# Altium PCB TCM-01.PcbDoc
Units mm, origin at the board's own origin, x right, y up, seen from the top; angles counter-clockwise.
Board outline 30.02 x 30.02 mm, 4 copper layers (Top Layer, VCC, GND, Bottom Layer), stack 0.532 mm thick; 81 components, 49 nets, 208 pads, 188 vias.
Unrouted connection lines stored in the file: 1.
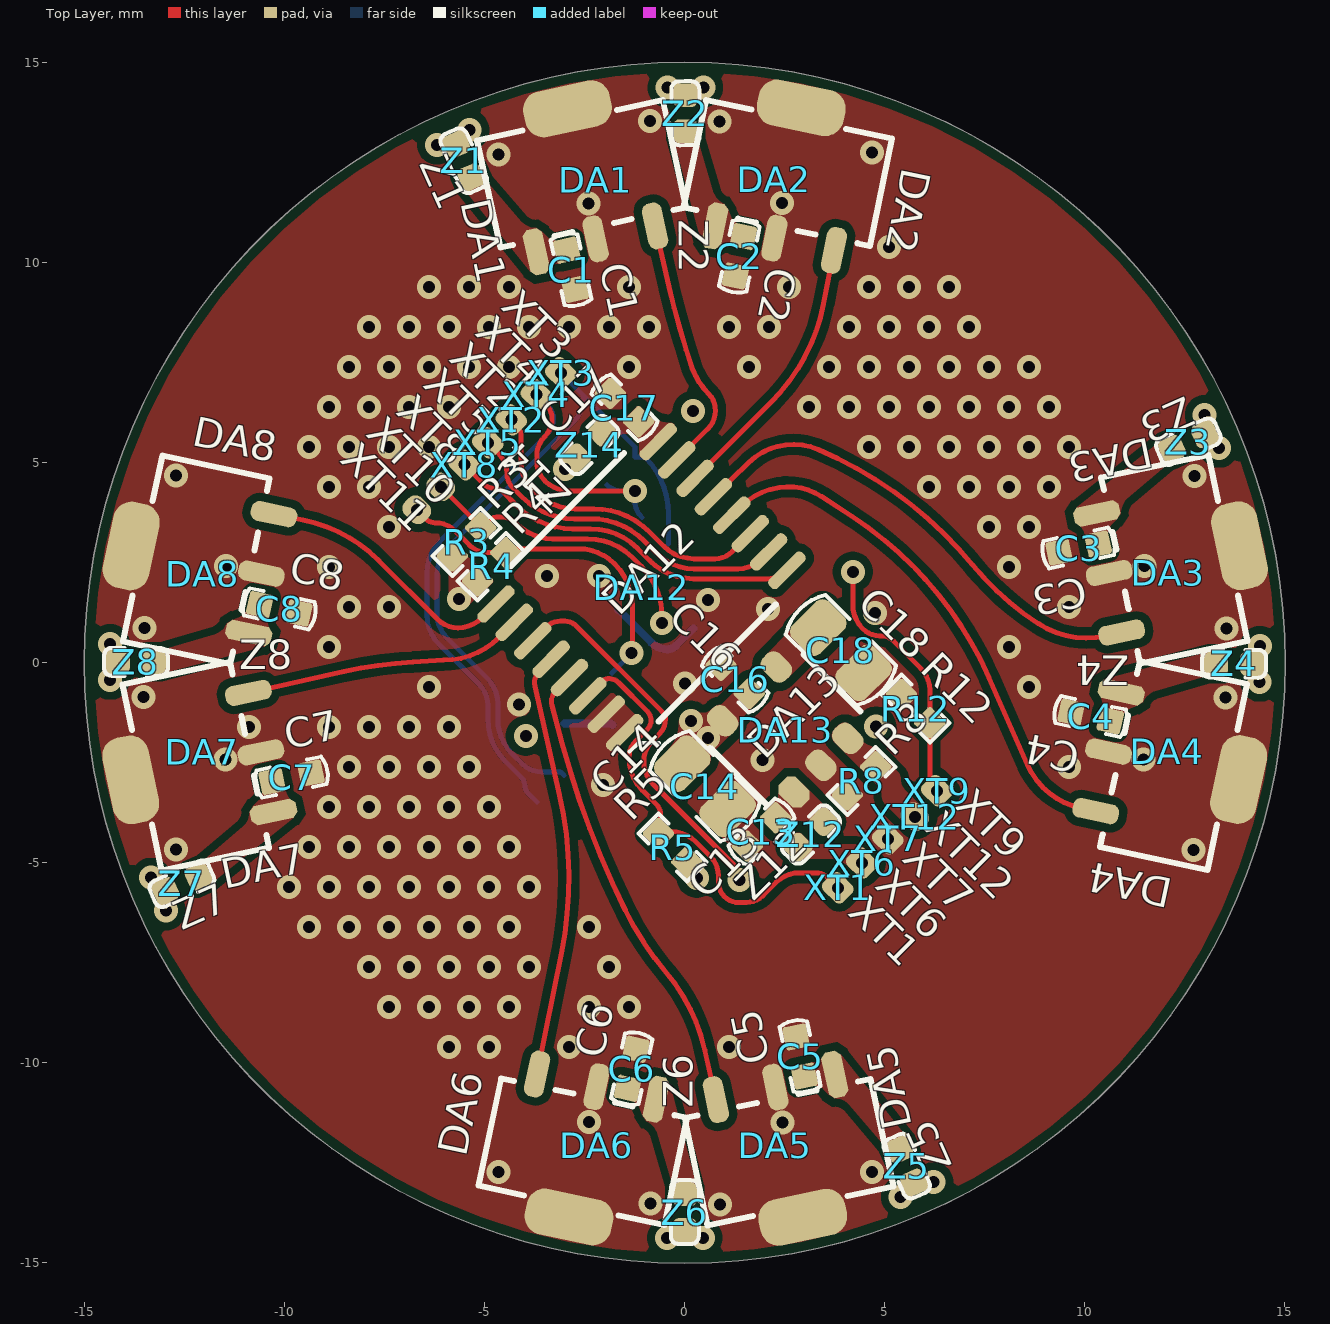
[diagram p0: Top Layer view]
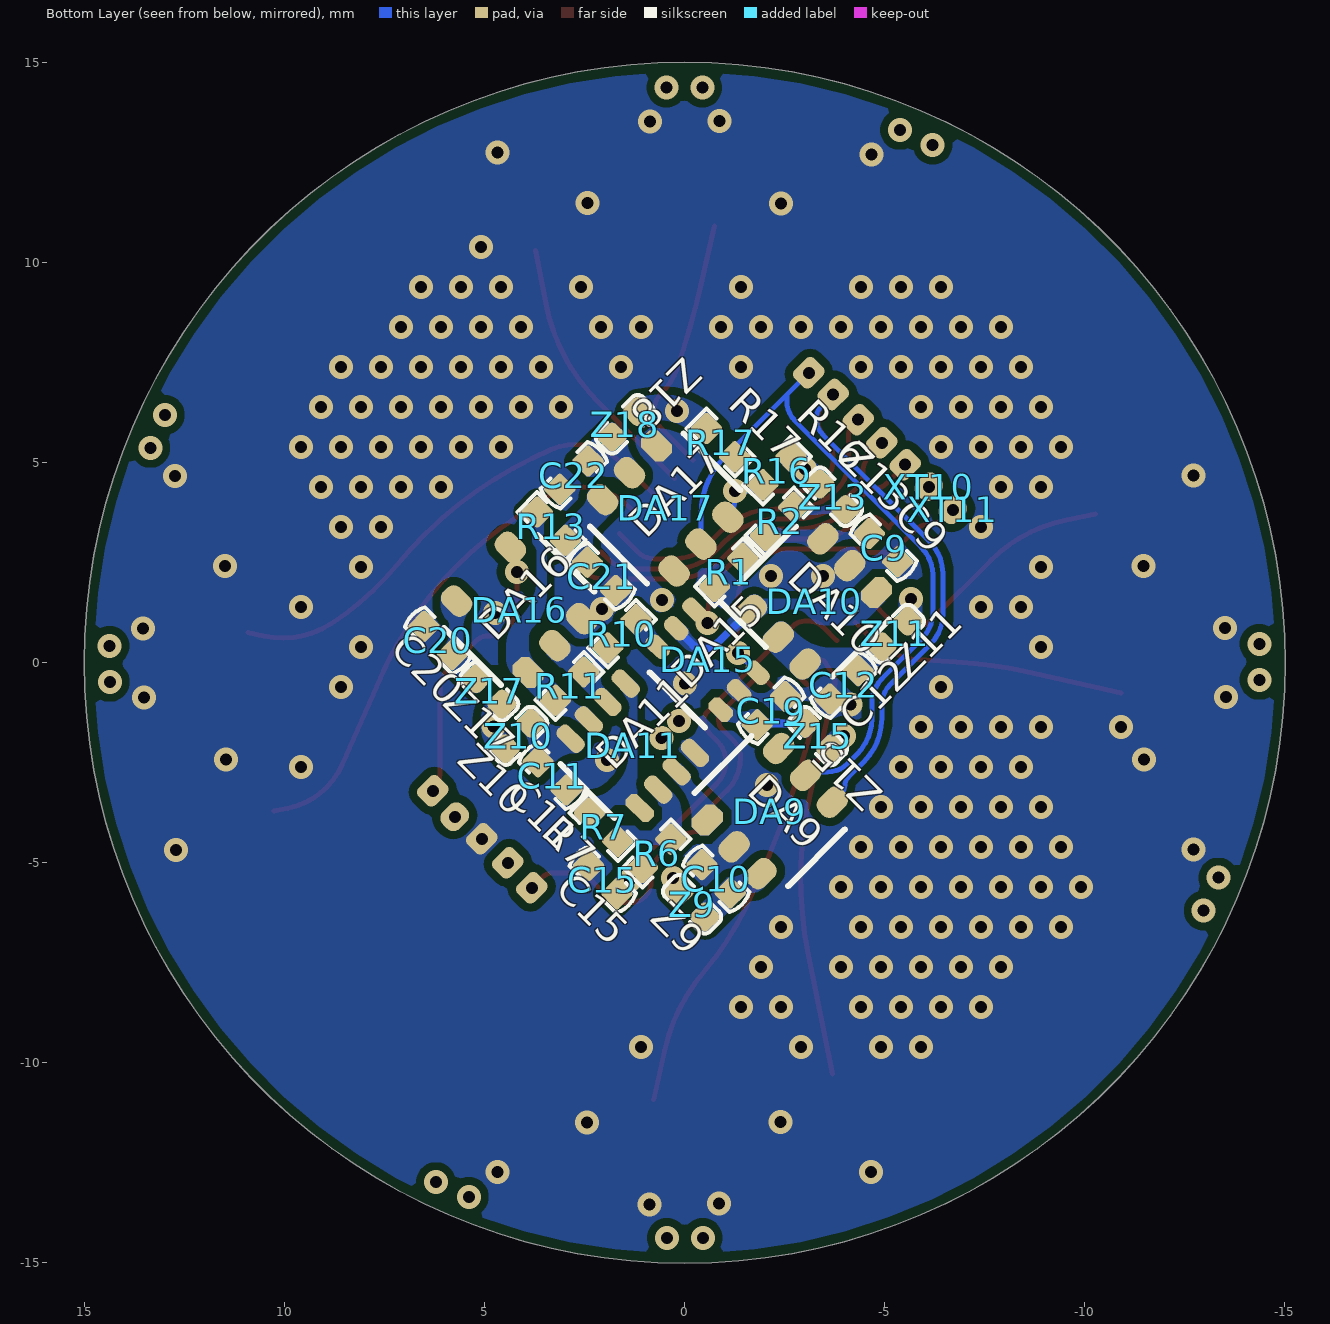
[diagram p1: Bottom Layer view, seen from below]
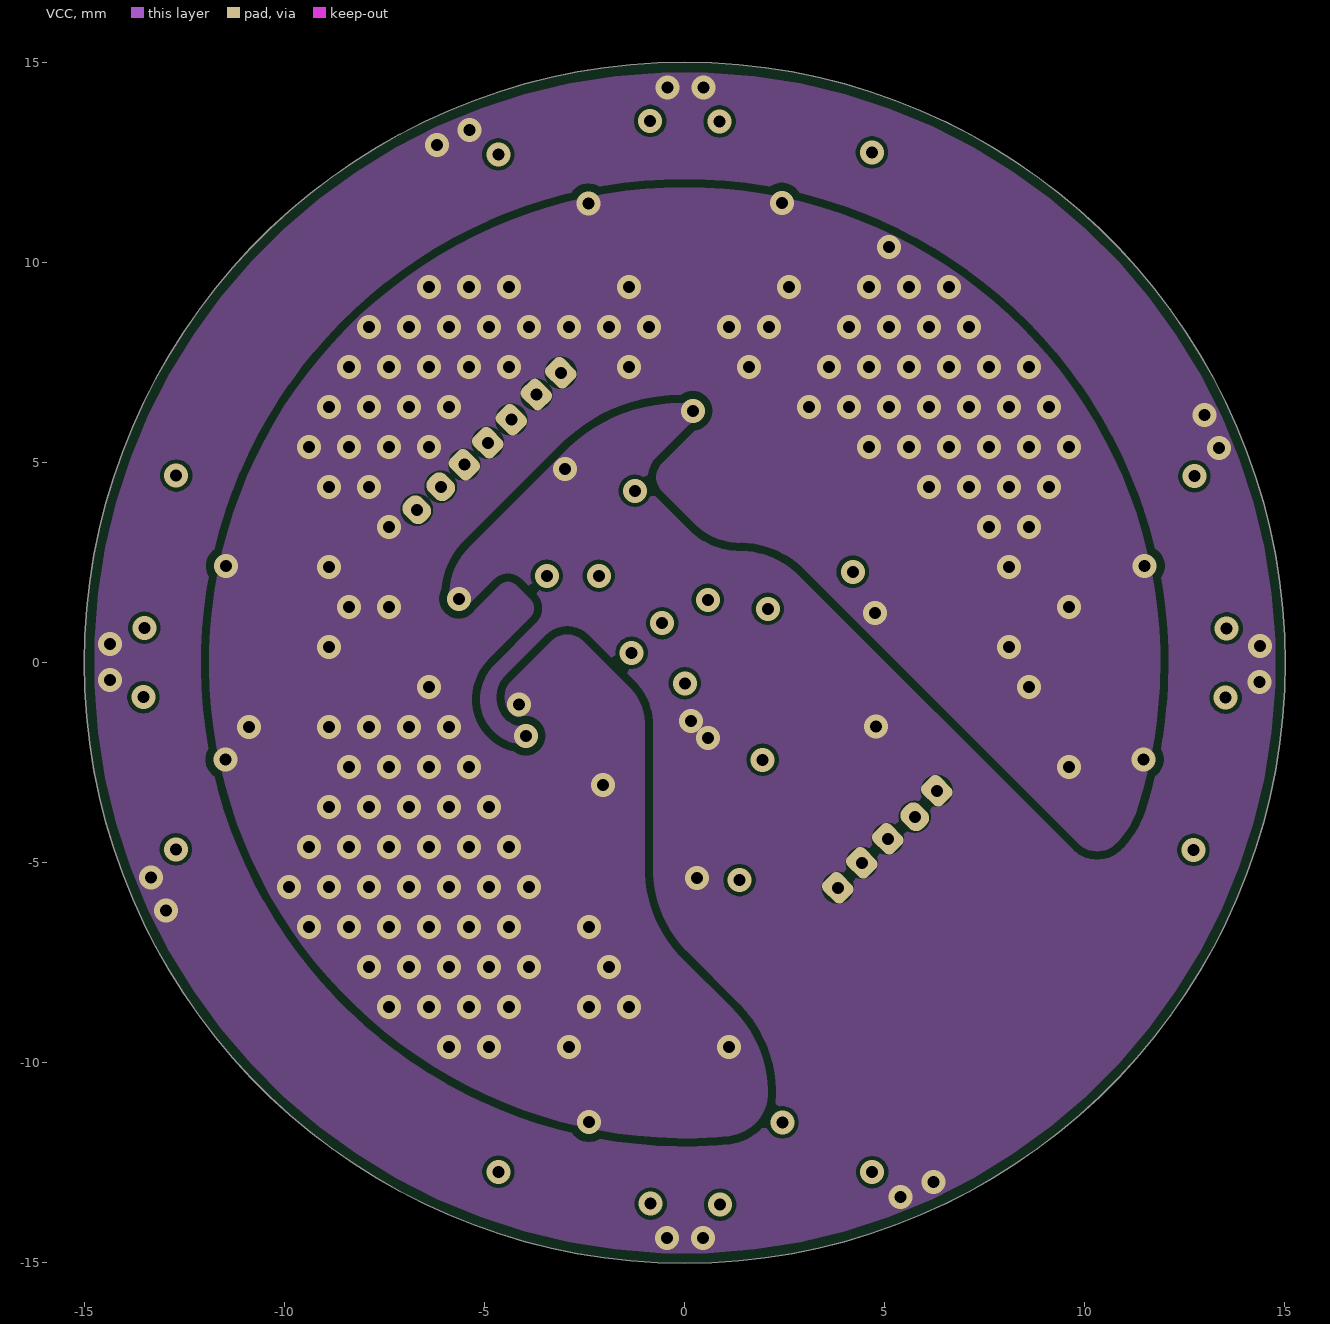
[diagram p2: VCC]
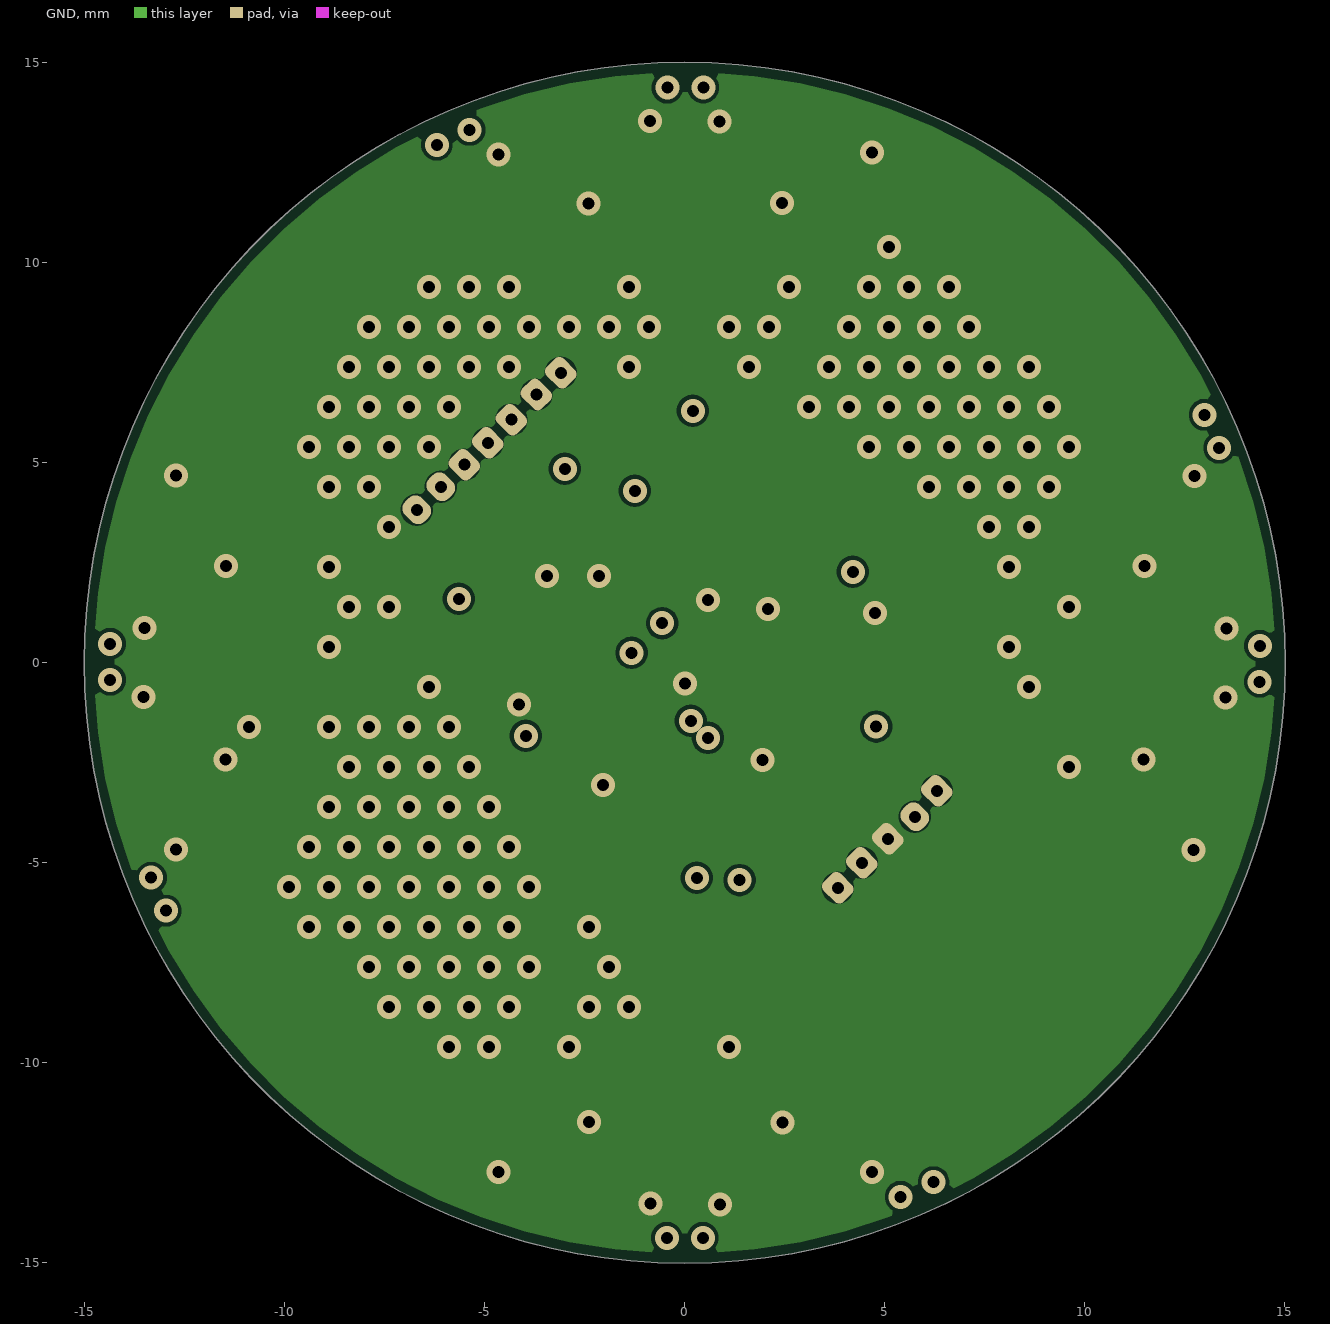
[diagram p3: GND]
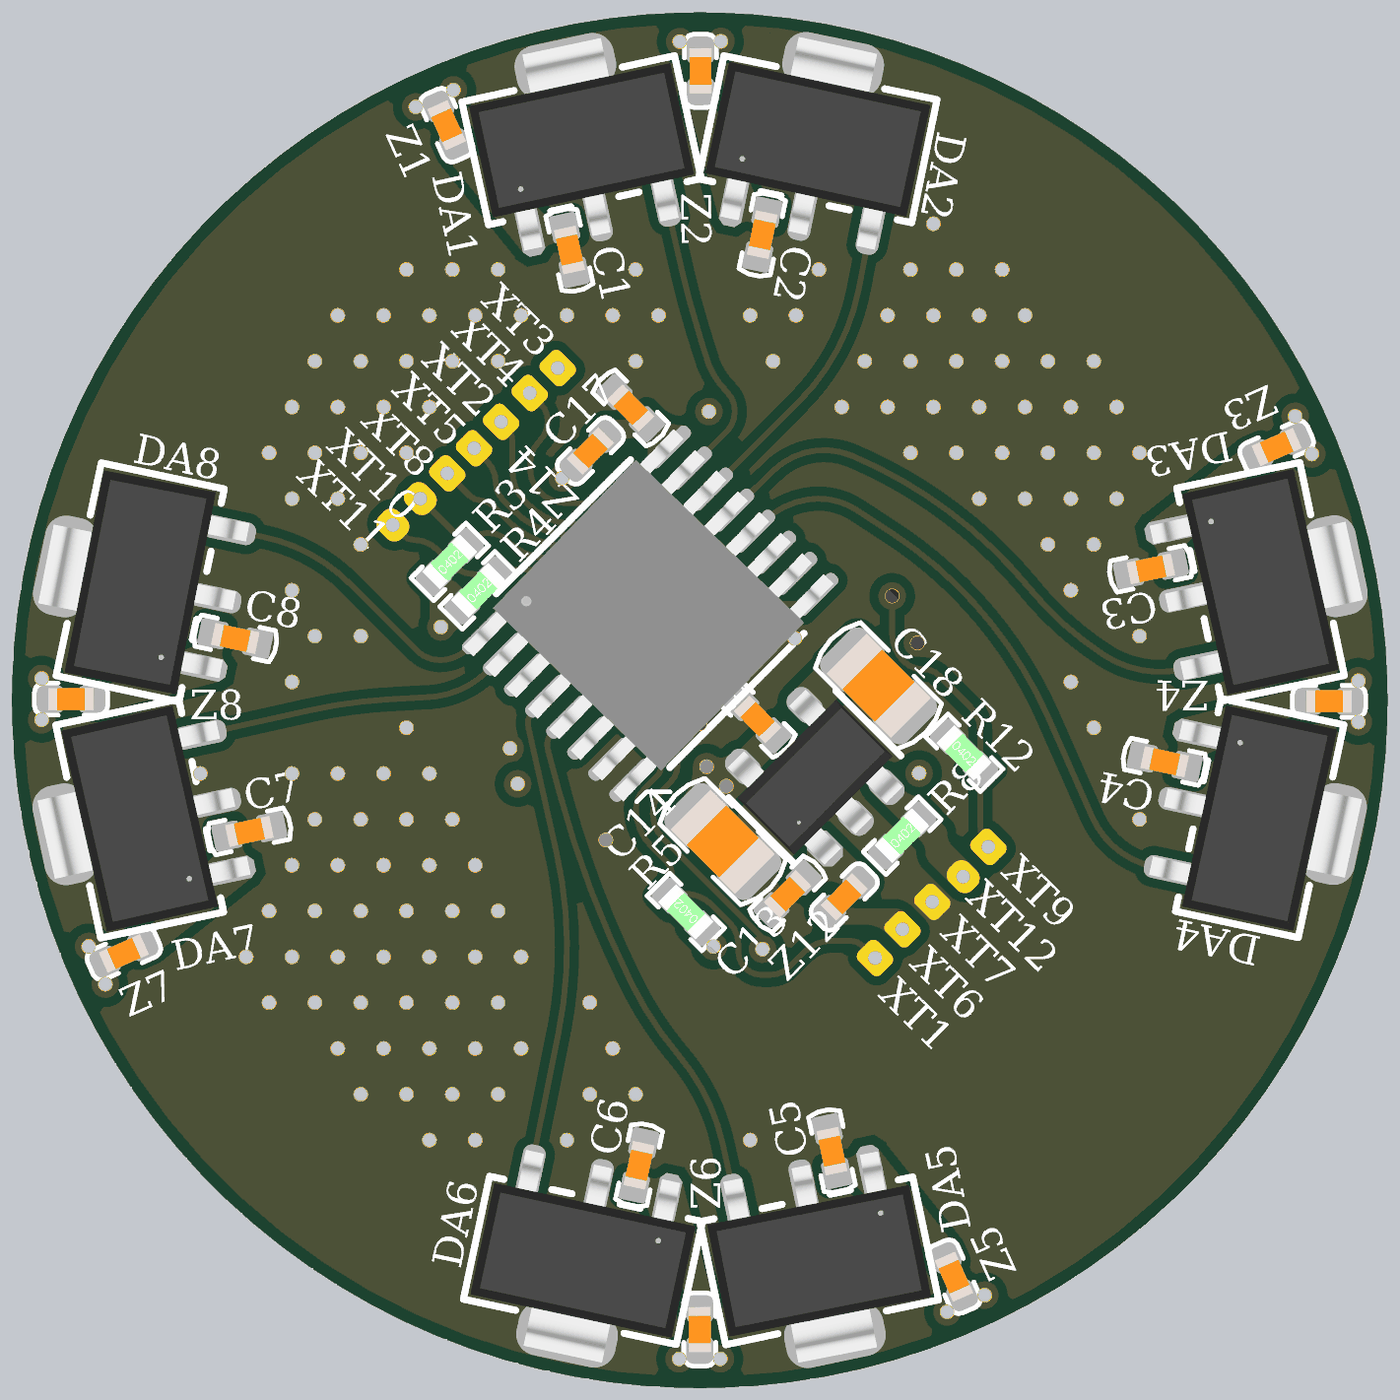
[diagram p4: 3D render of the assembled board from above, using the file's embedded part models]
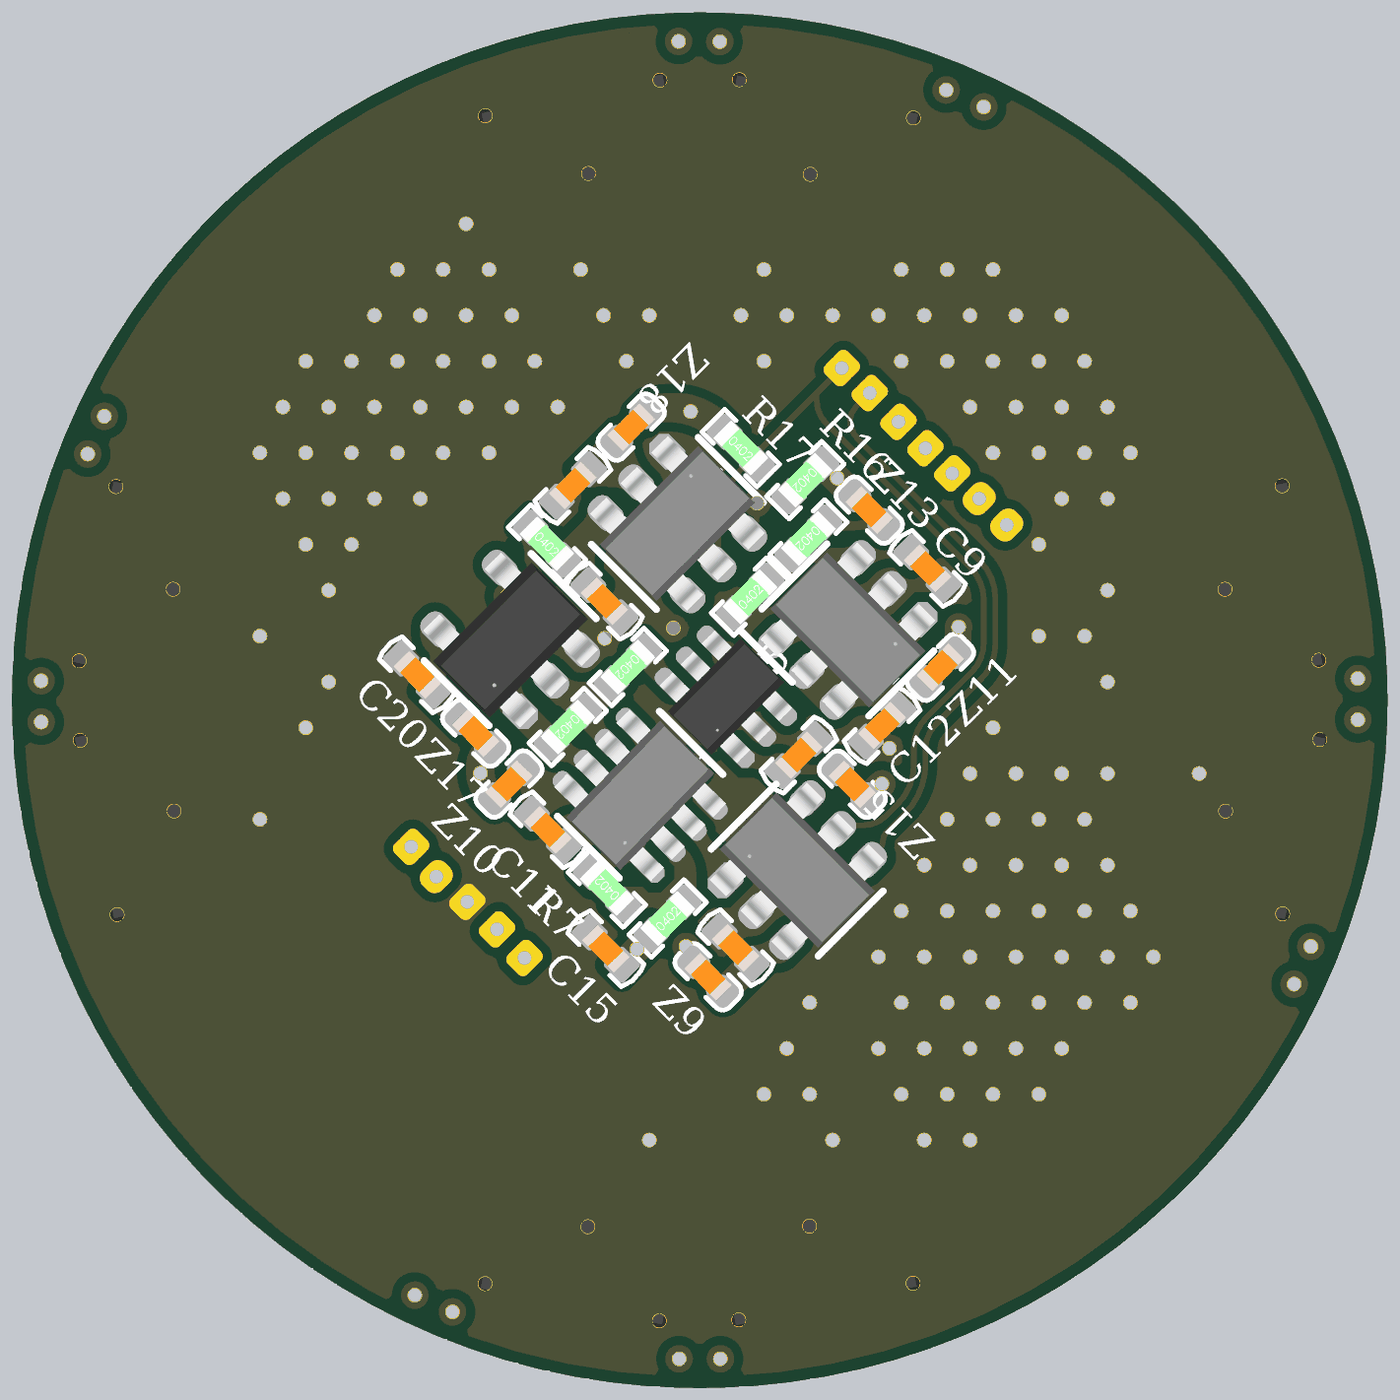
[diagram p5: 3D render of the assembled board from below, using the file's embedded part models]

## Layer stack, top to bottom
Top Solder: solder mask 0.0102, Solder Resist, Dk 3.5
Top Layer: signal copper 0.0175
Dielectric 2: prepreg 0.0711, PP-006, Dk 4.1
VCC: signal copper 0.0175
Dielectric 1: dielectric 0.32, FR-4, Dk 4.8
GND: signal copper 0.0175
Dielectric 3: prepreg 0.0711, PP-006, Dk 4.1
Bottom Layer: signal copper 0.0175
Bottom Solder: solder mask 0.0102, Solder Resist, Dk 3.5

## Board outline
-15.011,0 ccw(c0,0) 0,-15.011 ccw(c0,0) 15.011,0 ccw(c0,0) 0,15.011 ccw(c0,0)

## Design rules (kind name [scope] priority, off if disabled: settings)
AcuteAngle [All] p1: minimum=3.50000000000000E+0001 checktracksonly=FALSE
BoardOutlineClearance "BoardOutlineClearance 1" [All] p1: gap=0.25 ignorepadtopadclearanceinfootprint=FALSE except(0: Arc-SplitContinuation Track-SplitContinuation SMDPad-SplitContinuation THPad-SplitContinuation Via-SplitContinuation Fill-SplitContinuation Poly-SplitContinuation Region-SplitContinuation Text-SplitContinuation) // Milling
Clearance "Clearance-1 1/2 Oz" [All] p1: gap=0.125 ignorepadtopadclearanceinfootprint=FALSE except(0.2: Arc-Fill Arc-Poly Track-Fill Track-Poly SMDPad-SMDPad SMDPad-Fill SMDPad-Poly THPad-Fill THPad-Poly Via-Fill Via-Poly Fill-Fill Fill-Poly Poly-Poly Poly-Region Poly-Text; 0.25: Arc-Hole Track-Hole SMDPad-Hole THPad-Hole Via-Hole Fill-Hole Poly-Hole Region-Hole Text-Hole) // Standart
ComponentClearance [All] p1: gap=0.2 collisioncheckmode=3 verticalgap=0.254 showdistances=FALSE
DiffPairsRouting "DiffPairsRouting 1 Oz" [All] p1: maxlimit=0.254 minlimit=0.2 mostfreqgap=0.254 toplayer_minwidth=0.2 toplayer_maxwidth=0.381 toplayer_prefwidth=0.381 midlayer1_minwidth=0.2 midlayer1_maxwidth=0.381 midlayer1_prefwidth=0.381 midlayer2_minwidth=0.2 midlayer2_maxwidth=0.381 midlayer2_prefwidth=0.381 bottomlayer_minwidth=0.2 bottomlayer_maxwidth=0.381 bottomlayer_prefwidth=0.381 maxuncoupledlength=12.7
DiffPairsRouting "DiffPairsRouting 1/2 Oz" [All] p2: maxlimit=0.254 minlimit=0.1 mostfreqgap=0.254 toplayer_minwidth=0.1 toplayer_maxwidth=0.381 toplayer_prefwidth=0.381 midlayer1_minwidth=0.1 midlayer1_maxwidth=0.381 midlayer1_prefwidth=0.381 midlayer2_minwidth=0.1 midlayer2_maxwidth=0.381 midlayer2_prefwidth=0.381 bottomlayer_minwidth=0.1 bottomlayer_maxwidth=0.381 bottomlayer_prefwidth=0.381 maxuncoupledlength=12.7
HoleSize "Minimum HoleSize" [IsPad] p1: absolutevalues=TRUE maxlimit=5.9 minlimit=0.3 maxpercent=80.000 minpercent=20.000
HoleSize "Minimum HoleSize VIA 1" [IsVia] p2: absolutevalues=TRUE maxlimit=5.9 minlimit=0.3 maxpercent=80.000 minpercent=20.000 // Standart
HoleToHoleClearance Hole2HoleClearance [All] p1: gap=0.25 allowstackedmicrovias=FALSE
MinimumAnnularRing "Minimum AR VIA Standart" [IsVia] p1: minimumring=0.15
MinimumAnnularRing "Minimum AR PAD Standart" [IsPAD] p2: minimumring=0.15
MinimumSolderMaskSliver "SolderMask Bridge Standart" [All] p1: minsoldermaskwidth=0.15 // All Masks
NetAntennae [All] p1 off: netantennaetolerance=0
PlaneClearance "PlaneClearance-1 1/2 Oz" [All] p1: clearance=0.2 // Standart
PlaneConnect "TermalConnect-1 1/2 Oz" [All] p1: planeconnectstyle=Direct reliefexpansion=0.2 reliefentries=4 reliefconductorwidth=0.2 reliefairgap=0.2 // Standart
PolygonConnect "PolygonConnect-1 1/2 Oz" [All] p1: connectstyle=Direct reliefconductorwidth=0.15 reliefentries=4 polygonreliefangle="90 Angle" airgapwidth=0.2 // Standart
RoutingVias [All] p1: holewidth=0.3 width=0.6 viastyle="Through Hole" minholewidth=0.3 minwidth=0.6 maxholewidth=5.9 maxwidth=6.4
SilkToSilkClearance Silk2SilkClearance [All] p1 off: silktosilkclearance=0.15
SilkToSolderMaskClearance Silk2SolderMaskClearance [IsPad] p1 off: minsilkscreentomaskgap=0.15 clearancetoexposedcopper=TRUE
SolderMaskExpansion SolderMaskExpansion-1 [All] p1: expansion=0.05 istentingtop=FALSE // Standart
SupplyNets "Schematic Supply Nets_4" [InNet('DAC_PWR')] p1: voltage=0.000
SupplyNets "Schematic Supply Nets_5" [InNet('GND')] p2: voltage=0.000
SupplyNets "Schematic Supply Nets_3" [InNet('BUF_PWR')] p3: voltage=0.000
SupplyNets "Schematic Supply Nets_2" [InNet('+5v')] p4: voltage=0.000
SupplyNets "Schematic Supply Nets" [InNet('+3v3')] p5: voltage=0.000
UnRoutedNet [All] p1: checkbadconnections=TRUE
Width "Width 1/2 Oz" [All] p1: maxlimit=10 minlimit=0.1 preferedwidth=0.125 toplayer_minwidth=0.125 bottomlayer_minwidth=0.125 minimp=50.000000 maximp=50.000000 favimp=50.000000 checkconnectedcopper=TRUE
19 further rules are at their usual default settings.

## Classes and differential pairs
component class CH4: C7 C8 DA7 DA8 Z7 Z8
component class CH3: C5 C6 DA5 DA6 Z5 Z6
component class CH2: C3 C4 DA3 DA4 Z3 Z4
component class CH1: C1 C2 DA1 DA2 Z1 Z2

## Components (designator, comment, footprint, x,y, rotation, side; value= is the part's Value field where it differs from the comment)
C1 "0.1мк" CC0402 -2.844,9.828 r102.26 top
C2 "0.1мк" CC0402 1.365,10.162 r78.36 top
C3 "0.1мк" CC0402 9.847,2.868 r11.8 top
C4 "0.1мк" CC0402 10.148,-1.343 r347.9 top
C5 "0.1мк" CC0402 2.886,-9.842 r281.9 top
C6 "0.1мк" CC0402 -1.325,-10.15 r258 top
C7 "0.1мк" CC0402 -9.83,-2.862 r191.9 top
C8 "0.1мк" CC0402 -10.138,1.349 r168 top
C9 "0.1мк" CC0402 -4.97,2.878 r45 bottom
C10 "0.1мк" CC0402 -0.784,-5.4 r225 bottom
C11 "0.1мк" CC0402 3.315,-2.829 r45 bottom
C12 "0.1мк" CC0402 -3.98,-0.552 r135 bottom
C13 "0.1мк" CC0402 1.918,-4.228 r45 top
C14 "4.7мк" CC0805 0.503,-3.084 r135 top
C15 "1н" CC0402 2.05,-5.421 r225 bottom
C16 "0.1мк" CC0402 1.259,-0.415 r315 top
C17 "0.1мк" CC0402 -1.507,6.379 r315 top
C18 "4.7мк" CC0805 3.903,0.316 r135 top
C19 "0.1мк" CC0402 -2.162,-1.197 r315 bottom
C20 "0.1мк" CC0402 6.164,0.557 r225 bottom
C21 "10н" CC0402 2.08,2.161 r225 bottom
C22 "0.1мк" CC0402 2.77,4.689 r135 bottom
DA1 "SS59ET" SOT-89B -2.573,12.211 r12.26 top
DA2 "SS59ET" SOT-89B 2.578,12.232 r348.36 top
DA3 "SS59ET" SOT-89B 12.228,2.579 r281.8 top
DA4 "SS59ET" SOT-89B 12.207,-2.573 r257.9 top
DA5 "SS59ET" SOT-89B 2.6,-12.224 r191.9 top
DA6 "SS59ET" SOT-89B -2.551,-12.212 r168 top
DA7 "SS59ET" SOT-89B -12.212,-2.576 r101.9 top
DA8 "SS59ET" SOT-89B -12.2,2.575 r78 top
DA9 "MCP4726A0T-E/CH" SOT-23-6 -2.127,-3.708 r135 bottom
DA10 "TLV9061SQDBVRQ1" SOT-23-6 -3.232,1.534 r315 bottom
DA11 "TLV9062IDDFR" SOT-23-8 1.302,-2.077 r45 bottom
DA12 "CD74HC4051PWR" TSSOP-16 -1.119,1.855 r44.99 top
DA13 "LM8805SF5-3.3" SOT-23-5 2.52,-1.68 r135 top
DA15 "MCP4017T-103ELT" SC-70-6 -0.572,0.075 r45 bottom
DA16 "TS5A3166DBVR" SOT-23-5 4.131,1.313 r45 bottom
DA17 "ADC121C021CIMK" SOT-23-6 0.489,3.858 r225 bottom
R1 "10к" RC0402 -1.099,2.259 r135 bottom
R2 "10к" RC0402 -2.371,3.532 r315 bottom
R3 "2.2к" RC0402 -5.456,3.022 r45 top
R4 "2.2к" RC0402 -4.828,2.4 r45 top
R5 "10к" RC0402 -0.304,-4.621 r135 top
R6 "10к" RC0402 0.701,-4.764 r135 bottom
R7 "10к" RC0402 2.027,-4.11 r45 bottom
R8 "10к" RC0402 4.418,-2.953 r45 top
R10 "1к" RC0402 1.57,0.726 r315 bottom
R11 "10к" RC0402 2.878,-0.582 r315 bottom
R12 "10к" RC0402 5.771,-1.146 r315 top
R13 "100" RC0402 3.335,3.417 r225 bottom
R16 "2.2к" RC0402 -2.304,4.804 r315 bottom
R17 "2.2к" RC0402 -0.896,5.504 r225 bottom
XT1 "Pad" PAD#1 3.825,-5.625 r315 top
XT2 "Pad" PAD#1 -4.336,6.077 r315 top
XT3 "Pad" PAD#1 -3.1,7.25 r315 top
XT4 "Pad" PAD#1 -3.711,6.706 r315 top
XT5 "Pad" PAD#1 -4.925,5.5 r315 top
XT6 "Pad" PAD#1 4.425,-5 r315 top
XT7 "Pad" PAD#1 5.075,-4.4 r315 top
XT8 "Pad" PAD#1 -5.511,4.952 r315 top
XT9 "Pad" PAD#1 6.3,-3.2 r315 top
XT10 "Pad" PAD#2 -6.1,4.4 r315 bottom
XT11 "Pad" PAD#2 -6.7,3.825 r315 bottom
XT12 "Pad" PAD#2 5.75,-3.85 r315 top
Z1 "FB" IND0402 -5.525,12.551 r294.26 top
Z2 "FB" IND0402 0.017,13.738 r270.36 top
Z3 "FB" IND0402 12.592,5.527 r203.8 top
Z4 "FB" IND0402 13.734,-0.024 r179.9 top
Z5 "FB" IND0402 5.549,-12.582 r113.9 top
Z6 "FB" IND0402 0,-13.734 r90 top
Z7 "FB" IND0402 -12.57,-5.525 r23.9 top
Z8 "FB" IND0402 -13.722,0.024 r0 top
Z9 "FB" IND0402 -0.182,-6.037 r225 bottom
Z10 "FB" IND0402 4.165,-1.829 r315 bottom
Z11 "FB" IND0402 -5.253,0.721 r315 bottom
Z12 "FB" IND0402 3.153,-4.293 r225 top
Z13 "FB" IND0402 -3.7,4.15 r225 bottom
Z14 "FB" IND0402 -2.385,5.443 r45 top
Z15 "FB" IND0402 -3.329,-1.834 r45 bottom
Z17 "FB" IND0402 4.891,-0.716 r45 bottom
Z18 "FB" IND0402 1.497,5.962 r315 bottom

## Footprints (in the part's own frame and the unit in brackets; to place one, negate y for a bottom-side part, rotate by r counter-clockwise, add the part's x,y. Pads: shape width x height; smd on the part's side, far side on the other; paste and mask are expansions set on the pad)
CC0402 [mm] "Chip Capacitor, Body 1.0x0.5mm, IPC High Density"
  rrect25% 0.6x0.6 smd mask+0: 1(-0.5,0) 2(0.5,0)
  silkscreen extent -0.91,-0.35 0.91,0.35, body extent -0.5,-0.25 0.5,0.25, height 0.5
CC0805 [mm] "Chip Capacitor, Body 2.0x1.3mm, IPC High Density"
  rrect50% 1x1.3 smd mask+0: 1(-0.8,0) 2(0.8,0)
  silkscreen extent -1.45,-0.7 1.45,0.7, body extent -1,-0.62 1,0.63, height 0.6
IND0402 [mm] "1.6x0.8mm, IPC Medium Density"
  rrect50% 0.6x0.6 smd mask+0: 1(-0.45,0) 2(0.45,0)
  silkscreen extent -0.8,-0.35 0.8,0.35, body extent -0.5,-0.25 0.5,0.25, height 0.5
PAD#1 [mm]
  rrect50% 0.7x0.6 hole 0.3 mask+0: 1(0,0)
PAD#2 [mm]
  rrect80% 0.7x0.6 hole 0.3 mask+0: 1(0,0)
RC0402 [mm] "Chip Resistor, Body 1.1x0.5mm, IPC Medium Density"
  rrect25% 0.6x0.6 smd mask+0: 1(-0.5,0) 2(0.5,0)
  silkscreen extent -0.85,-0.35 0.85,0.35, body extent -0.57,-0.28 0.57,0.28, height 0.41
SC-70-6 [mil]
  oct 26x16 smd paste+0 mask+0: 1(-43.8,25.59)
  rrect80% 26x16 smd paste+0 mask+0: 2(-43.8,0) 3(-43.8,-25.59) 4(43.8,-25.59) 5(43.8,0) 6(43.8,25.59)
  silkscreen extent -32,-49 32,49, body extent -47,-44 47,44, height 43
SOT-23-5 [mm]
  oct 0.8x0.6 smd paste+0 mask+0: 1(-1.25,0.95)
  rrect80% 0.8x0.6 smd paste+0 mask+0: 2(-1.25,0) 3(-1.25,-0.95) 4(1.275,-0.95) 5(1.275,0.95)
  silkscreen extent -0.99,-1.65 1.02,1.65, body extent -1.5,-1.52 1.5,1.52, height 1.45
SOT-23-6 [mm]
  oct 0.8x0.6 smd paste+0 mask+0: 1(-1.262,0.95)
  rrect80% 0.8x0.6 smd paste+0 mask+0: 2(-1.262,0) 3(-1.262,-0.95) 4(1.262,-0.95) 5(1.262,0) 6(1.262,0.95)
  silkscreen extent -1,-1.65 1,1.65, body extent -1.5,-1.52 1.5,1.52, height 1.09
SOT-23-8 [mm]
  oct 0.798x0.4 smd paste+0 mask+0: 1(-1.225,0.972)
  rrect80% 0.798x0.4 smd paste+0 mask+0: 2(-1.225,0.322) 3(-1.225,-0.328) 4(-1.225,-0.978) 5(1.224,-0.978) 6(1.224,-0.328) 7(1.224,0.322) 8(1.224,0.972)
  silkscreen extent -0.95,-1.6 0.95,1.6, body extent -1.49,-1.5 1.49,1.49, height 1.09
SOT-89B [mil]
  oct 19.68x46 smd paste+0 mask+0: 1(-60,-65)
  rrect80% 19.68x46 smd paste+0 mask+0: 2(-0.16,-65) 3(59.69,-65)
  rrect80% 86.61x46 smd paste+0 mask+0: 4(-0.16,66)
  silkscreen extent -94,-54 93,55, body extent -89,-82 88,83, height 51
TSSOP-16 [mil]
  oct 46x12 smd paste+0 mask+0: 1(-111,89.57)
  rrect80% 46x12 smd paste+0 mask+0: 2(-111,63.98) 3(-111,38.39) 4(-111,12.8) 5(-111,-12.8) 6(-111,-38.39) 7(-111,-63.98) 8(-111,-89.57) 9(115,-89.57) 10(115,-63.98) 11(115,-38.39) 12(115,-12.79) 13(115,12.8) 14(115,38.39) 15(115,63.98) 16(115,89.57)
  silkscreen extent -79,-105 83,106, body extent -132,-103 132,103, height 47

## Part data
C1 C2 C3 C4 C5 C6 C7 C8 C9 C10 C11 C12 C13 C14 C15 C16 C17 C18 C19 C20 C21 C22: library part Capacitor
  C1 C2 C3 C4 C5 C6 C7 C8 C9 C10 C11 C12 C13 C16 C17 C19 C20 C22: Volume=0.1мк
  C14 C18: Volume=4.7мк
  C15: Volume=1н
  C21: Volume=10н
DA1 DA2 DA3 DA4 DA5 DA6 DA7 DA8: "SS59ET Honeywell Linear Hall-effect sensor"
DA9: "MCP4726A0T-E/CH DAC 12-bit"
DA10: "Automotive, single, 5.5-V 10-MHz rail-to-rail input and output operational amplifier 6-SOT-23 -40 to 125"
DA11: "TLV9062IDDFR 2-gate OPAMP"
DA12: "5-V, 8:1, 1-channel analog multiplexer 16-TSSOP -55 to 125"
DA13: "The LM8805 series is a low-dropout linear regulator. / There are devices designed specifically for batteryoperated systems. Ground current is very small (50uATyp), that significantly extending battery life. Low power / consumption and high accuracy is achieved through / CMOS and programmable fuse technologies. Output / voltage: 1.5V to 6.0V."
DA15: "MCP4018T-103ELT Digital Rheostat 10k"
DA16: "0.9Ohm on-state resistance, 5-V, 1:1 (SPST), 1-channel analog switch (active high) 5-SOT-23 -40 to 85"
DA17: "I2C-Compatible, 12-Bit Analog-to-Digital Converter with Alert Pin 6-SOT-23-THIN -40 to 105"
R1 R2 R3 R4 R5 R6 R7 R8 R10 R11 R12 R13 R16 R17: library part Resistor
  R13: Volume=100

## Via types
v1: diameter 0.6, hole 0.3, Top Layer to Bottom Layer, tented both sides, 188 vias

## Nets (pads, with @x,y where several pads share a name; then routed paths per layer and width w, separated by ;. In a path a pad name is that pad's centre, name@x,y a point inside that pad or via, vN(x,y) a via of type N, cw(c..) or ccw(c..) an arc to the next point about the centre after c; other vN are vias at no path point)
+3v3: C14.2 C16.2 DA13.5 R3.1 R4.1 R5.1 R16.1 R17.1 Z1.1 Z2.1 Z3.1 Z4.1 Z5.1 Z6.1 Z7.1 Z8.1 Z9.1 Z10.2 Z11.1 Z13.1 Z14.1 Z15.1 Z17.1 Z18.1
  other v1: -0.45,-14.375 0.45,-14.375 5.397,-13.35 6.22,-12.986 -12.974,-6.196 -13.338,-5.374 0.3,-5.375 0.579,-1.877 -3.975,-1.825 4.787,-1.594 0.15,-1.45 14.374,-0.475 -14.363,-0.426 14.376,0.425 -14.363,0.474 -5.65,1.6 -3,4.85 13.36,5.374 12.996,6.198 0.2,6.3 -6.198,12.95 -5.378,13.32 -0.437,14.376 0.463,14.382
+5v: XT6.1 Z12.2
BUF_PWR: C12.2 DA10.5 DA10.6 Z11.2
CH: C15.2 DA12.3 R6.1 | length 9.7
  Top Layer w0.125: DA12.3 DA12.3@-3.454,0.898 ; DA12.3@-3.454,0.898 cw(c-3.108,0.552) -3.108,1.042 -2.995,1.042 cw(c-2.995,0.65) -2.718,0.927 -0.563,-1.228 cw(c-0.758,-1.423) -0.483,-1.423 cw(c-0.976,-1.423) -0.627,-1.771 -0.812,-1.955 ccw(c-0.296,-2.471) -1.025,-2.471 ccw(c-0.231,-2.471) -0.793,-3.032 1.37,-5.195 v1(1.37,-5.433)
CH1-1: DA1.3 DA12.15 | length 6.5
  Top Layer w0.125: DA1.3 -0.392,9.395 ccw(c18.906,13.817) 0.036,7.825 0.193,7.333 ccw(c1.909,8.038) 0.597,6.726 cw(c0.19,6.319) 0.765,6.302 cw(c0.125,6.302) 0.578,5.849 DA12.15
CH1-2: DA2.3 DA12.14 | length 6.9
  Top Layer w0.125: DA12.14 2.158,6.51 ccw(c-1.226,9.894) 3.472,8.981 DA2.3
CH2-1: DA3.3 DA12.13 | length 12.3
  Top Layer w0.125: DA12.13 1.604,5.01 cw(c2.712,3.868) 3.336,5.332 cw(c-0.648,-4.021) 7.2,2.441 ccw(c12.784,7.041) 8.828,0.983 ccw(c10.053,2.858) 10.535,0.672 DA3.3
CH2-2: DA4.3 DA12.12 | length 13.3
  Top Layer w0.125: DA12.12 1.376,3.887 cw(c2.633,2.614) 2.363,4.383 cw(c2.593,2.88) 3.425,4.152 4.201,3.644 cw(c-0.874,-4.108) 7.603,-0.366 8.563,-2.542 ccw(c10.303,-1.774) 9.925,-3.638 DA4.3
CH3-1: DA5.3 DA12.5 | length 11.6
  Top Layer w0.125: DA12.5 -3.224,-0.71 ccw(c-2.964,-0.971) -3.319,-1.067 -3.065,-2.01 ccw(c18.923,3.916) -1.482,-6.196 ccw(c5.418,-2.776) -0.457,-7.754 cw(c-3.887,-10.66) 0.501,-9.683 DA5.3
CH3-2: DA6.3 DA12.4 | length 10.7
  Top Layer w0.125: DA6.3 -3.083,-7.257 ccw(c-12.363,-5.393) -3.129,-3.317 -3.743,-0.582 cw(c-3.358,-0.495) -3.692,-0.284 -3.473,0.062 DA12.4
CH4-1: DA7.3 DA12.2 | length 7
  Top Layer w0.125: DA7.3 -8.523,-0.221 cw(c-6.173,-10.784) -6.795,0.019 -6.029,0.063 ccw(c-6.029,2.043) -4.629,0.643 DA12.2
CH4-2: DA8.3 DA12.1 | length 6.7
  Top Layer w0.125: DA8.3 -9.543,3.569 cw(c-10.275,-0.076) -7.647,2.553 -6.177,1.083 ccw(c-5.675,1.585) -5.675,0.875 ccw(c-5.675,1.741) -5.062,1.129 DA12.1
DAC_PWR: C10.2 DA9.3 Z9.2
GND: C1.1 C2.1 C3.1 C4.1 C5.1 C6.1 C7.1 C8.1 C9.1 C10.1 C11.1 C12.1 C13.1 C14.1 C15.1 C16.1 C17.1 C18.1 C19.1 C20.1 C21.2 C22.1 DA1.2 DA1.4 DA2.2 DA2.4 DA3.2 DA3.4 DA4.2 DA4.4 DA5.2 DA5.4 DA6.2 DA6.4 DA7.2 DA7.4 DA8.2 DA8.4 DA9.2 DA10.2 DA11.4 DA12.7 DA12.8 DA13.2 DA15.2 DA16.3 DA17.1 R1.1 R8.1 R12.1 XT7.1
  other v1: 0.883,-13.546 -0.851,-13.524 4.686,-12.735 -4.657,-12.725 2.443,-11.491 -2.398,-11.478 -5.9,-9.6 -4.9,-9.6 -2.9,-9.6 1.1,-9.6 -7.4,-8.6 -6.4,-8.6 -5.4,-8.6 -4.4,-8.6 -2.4,-8.6 -1.4,-8.6 -7.9,-7.6 -6.9,-7.6 -5.9,-7.6 -4.9,-7.6 -3.9,-7.6 -1.9,-7.6 -9.4,-6.6 -8.4,-6.6 -7.4,-6.6 -6.4,-6.6 -5.4,-6.6 -4.4,-6.6 -2.4,-6.6 -9.9,-5.6 -8.9,-5.6 -7.9,-5.6 -6.9,-5.6 -5.9,-5.6 -4.9,-5.6 -3.9,-5.6 12.717,-4.679 -12.723,-4.662 -9.4,-4.6 -8.4,-4.6 -7.4,-4.6 -6.4,-4.6 -5.4,-4.6 -4.4,-4.6 -8.9,-3.6 -7.9,-3.6 -6.9,-3.6 -5.9,-3.6 -4.9,-3.6 -2.05,-3.05 -8.4,-2.6 -7.4,-2.6 -6.4,-2.6 -5.4,-2.6 9.6,-2.6 -11.479,-2.419 1.947,-2.425 11.474,-2.418 -10.9,-1.6 -8.9,-1.6 -7.9,-1.6 -6.9,-1.6 -5.9,-1.6 -4.14,-1.048 13.522,-0.874 -13.534,-0.859 -6.4,-0.6 8.6,-0.6 0,-0.513 -8.9,0.4 8.1,0.4 13.548,0.859 -13.512,0.875 4.75,1.25 2.075,1.35 -8.4,1.4 -7.4,1.4 9.6,1.4 0.575,1.575 -3.45,2.175 -2.15,2.175 -8.9,2.4 8.1,2.4 -11.466,2.422 11.495,2.423 -7.4,3.4 7.6,3.4 8.6,3.4 -8.9,4.4 -7.9,4.4 6.1,4.4 7.1,4.4 8.1,4.4 9.1,4.4 12.743,4.664 -12.713,4.681 -9.4,5.4 -8.4,5.4 -7.4,5.4 -6.4,5.4 4.6,5.4 5.6,5.4 6.6,5.4 7.6,5.4 8.6,5.4 9.6,5.4 -8.9,6.4 -7.9,6.4 -6.9,6.4 -5.9,6.4 3.1,6.4 4.1,6.4 5.1,6.4 6.1,6.4 7.1,6.4 8.1,6.4 9.1,6.4 -8.4,7.4 -7.4,7.4 -6.4,7.4 -5.4,7.4 -4.4,7.4 -1.4,7.4 1.6,7.4 3.6,7.4 4.6,7.4 5.6,7.4 6.6,7.4 7.6,7.4 8.6,7.4 -7.9,8.4 -6.9,8.4 -5.9,8.4 -4.9,8.4 -3.9,8.4 -2.9,8.4 -1.9,8.4 -0.9,8.4 1.1,8.4 2.1,8.4 4.1,8.4 5.1,8.4 6.1,8.4 7.1,8.4 -6.4,9.4 -5.4,9.4 -4.4,9.4 -1.4,9.4 2.6,9.4 4.6,9.4 5.6,9.4 6.6,9.4 5.1,10.4 -2.412,11.479 2.429,11.497 -4.663,12.709 4.68,12.759 0.869,13.533 -0.865,13.545
MUXAddr_0: DA12.11 XT2.1 | length 8.1
  Top Layer w0.125: XT2.1 -4.217,5.958 cw(c-4.528,5.648) -4.088,5.648 -4.088,4.991 ccw(c-3.193,4.991) -3.826,4.358 -3.726,4.257 ccw(c-2.742,5.241) -2.742,3.85 -2.274,3.85 cw(c-2.274,1.892) -0.89,3.276 -0.527,2.914 ccw(c0.231,3.672) 0.231,2.6 0.759,2.6 ccw(c0.759,3.197) 1.181,2.775 DA12.11
MUXAddr_1: DA12.10 XT5.1 | length 8.5
  Top Layer w0.125: XT5.1 -4.649,5.224 cw(c-5.129,4.744) -4.45,4.744 -4.45,4.741 ccw(c-3.938,4.741) -4.3,4.379 -4.059,4.138 ccw(c-2.761,5.436) -2.761,3.6 -2.369,3.6 -2.354,3.6 cw(c-2.354,1.7) -1.01,3.043 -1,3.033 -0.808,2.842 ccw(c0.379,4.029) -0.805,2.838 -0.705,2.739 ; -0.705,2.738 ccw(c0.231,3.672) 0.232,2.35 0.376,2.35 ccw(c0.379,4.029) 0.379,2.35 1.334,2.35 ccw(c1.334,3.173) 1.916,2.591 DA12.10
MUXAddr_2: DA12.9 XT8.1 | length 9.1
  Top Layer w0.125: XT8.1 -5.022,4.464 ccw(c-4.776,4.71) -4.776,4.362 cw(c-4.776,4.025) -4.538,4.263 -4.208,3.933 ccw(c-2.801,5.34) -2.801,3.35 -2.354,3.35 cw(c-2.354,1.7) -1.187,2.867 -0.872,2.551 ccw(c0.218,3.641) 0.218,2.1 2.046,2.1 ccw(c2.046,2.821) DA12.9
MUXEn: DA12.6 R5.2 XT1.1 | length 11.3
  Top Layer w0.125: DA12.6 -2.049,-0.454 cw(c-1.913,-0.589) -1.913,-0.398 -1.887,-0.398 cw(c-1.887,-0.721) -1.658,-0.492 -0.935,-1.216 cw(c-1.158,-1.439) -0.961,-1.685 -0.961,-1.688 -1.221,-1.948 ccw(c-0.801,-2.368) -1.395,-2.368 ccw(c-0.225,-2.368) -1.052,-3.195 -0.714,-3.534 cw(c-0.98,-3.8) -0.604,-3.8 -0.604,-4.221 -0.337,-4.221 cw(c-0.337,-5.087) 0.275,-4.475 0.64,-4.84 cw(c0.15,-5.33) 0.843,-5.33 0.843,-5.49 ccw(c1.347,-5.49) 1.347,-5.994 1.542,-5.994 ccw(c1.542,-5.417) 1.95,-5.825 2.278,-5.497 cw(c2.875,-6.095) 2.875,-5.25 3.288,-5.25 cw(c3.288,-5.628) 3.556,-5.361 3.82,-5.625 XT1.1
NetC1_2: C1.2 DA1.1 Z1.2
NetC2_2: C2.2 DA2.1 Z2.2
NetC3_2: C3.2 DA3.1 Z3.2
NetC4_2: C4.2 DA4.1 Z4.2
NetC5_2: C5.2 DA5.1 Z5.2
NetC6_2: C6.2 DA6.1 Z6.2
NetC7_2: C7.2 DA7.1 Z7.2
NetC8_2: C8.2 DA8.1 Z8.2
NetC9_2: C9.2 DA10.3 R1.2 R2.2
NetC11_2: C11.2 DA11.8 Z10.1
NetC13_2: C13.2 DA13.1 Z12.1
NetC17_2: C17.2 DA12.16 Z14.2
NetC18_2: C18.2 DA13.4
NetC19_2: C19.2 DA15.1 Z15.2 | length 1.2
  Bottom Layer w0.2: Z15.2 -1.894,-1.516 cw(c-1.894,-1.636) C19.2
NetC20_2: C20.2 DA16.5 Z17.2
NetC21_1: C21.1 DA17.3 R13.2
NetC22_2: C22.2 DA17.2 Z18.2
NetDA11_1: DA11.1 DA11.5 R7.2
NetDA11_2: DA11.2 R6.2 R7.1
NetDA11_6: DA11.6 DA16.2 R10.2 R11.1
NetDA11_7: DA11.7 DA16.1 R11.2 R13.1
NetDA15_6: DA15.6 R10.1
NetR2_1: R2.1 Z13.2
PWR_EN: DA13.3 R8.2 XT12.1
SCL: DA9.5 DA17.5 R17.2 XT3.1 | length 18
  Bottom Layer w0.125: XT3.1 -2.55,6.7 ; DA9.5 -3.104,-2.731 -3.571,-2.731 cw(c-3.571,-2.033) -4.064,-2.526 -4.309,-2.282 cw(c-3.424,-1.397) -4.675,-1.397 -4.675,-1.023 ccw(c-5.576,-1.023) -4.939,-0.386 -5.929,0.604 cw(c-5.276,1.258) -6.2,1.258 -6.2,2.189 cw(c-5.207,2.189) -5.909,2.891 -2.764,6.036 ccw(c-3.281,6.553) -2.55,6.553 -2.55,6.7 ; DA17.5 -0.404,3.71 ccw(c-2.44,3.71) -1,5.15 R17.2 -1.25,5.4 -2.55,6.7
SCL_LF: DA15.3 R4.2 XT11.1 | length 8.5
  Top Layer w0.125: XT11.1 -6.47,3.595 ccw(c-6.24,3.825) -6.24,3.5 cw(c-6.24,2.778) -5.73,3.289 -5.376,2.934 ccw(c-4.939,3.371) -4.939,2.754 R4.2 -4.378,2.85 -2.656,2.85 cw(c-2.656,1.581) -1.758,2.478 cw(c-2.844,1.393) -1.309,1.393 -1.309,0.27 v1(-1.328,0.25)
  Bottom Layer w0.125: DA15.3 -1.328,0.238 v1(-1.328,0.25)
SDA: DA9.4 DA17.6 R16.2 XT4.1 | length 18.8
  Top Layer w0.125: XT4.1 -3.47,6.465 cw(c-3.838,6.096) -3.317,6.096 cw(c-3.945,6.096) -3.501,5.653 -3.509,5.644 ccw(c-3.048,5.184) -3.7,5.184 -3.7,5.035 ccw(c-3.013,5.035) -3.499,4.549 ccw(c-2.898,5.149) -2.898,4.3 v1(-1.25,4.3)
  Bottom Layer w0.125: XT4.1 -3.401,6.396 cw(c-3.686,6.11) -3.283,6.11 cw(c-3.862,6.11) -3.452,5.701 -6.123,3.03 ccw(c-5.334,2.241) -6.45,2.241 -6.45,1.2 ccw(c-5.416,1.2) -6.147,0.468 -5.146,-0.533 cw(c-5.679,-1.066) -4.925,-1.066 -4.925,-1.397 ccw(c-3.401,-1.397) -4.479,-2.474 -4.078,-2.875 cw(c-4.266,-3.063) -4,-3.063 ccw(c-3.723,-3.063) -3.919,-3.259 DA9.4 ; R16.2 ccw(c-1.588,4.812) -1.588,4.3 v1(-1.25,4.3) -1.25,4.059 ccw(c-0.653,4.059) DA17.6
SDA_LF: DA15.4 R3.2 XT10.1 | length 7.5
  Top Layer w0.125: XT10.1 -5.103,3.404 R3.2 -4.966,3.511 cw(c-4.632,3.177) -4.632,3.65 -4.601,3.65 cw(c-4.601,3.103) -4.215,3.49 -4.194,3.469 ccw(c-3.303,4.361) -3.303,3.1 -2.429,3.1 cw(c-2.429,1.525) -1.315,2.639 -1.097,2.421 cw(c-2.383,1.135) -0.565,1.135 v1(-0.565,0.989)
SW: DA16.4 R12.2 XT9.1 | length 6.5
  Top Layer w0.125: v1(4.2,2.275) 4.2,1.454 ccw(c5.054,1.454) 4.45,0.85 ccw(c4.872,1.272) 4.872,0.675 4.9,0.675 cw(c4.9,0.217) 5.224,0.541 5.898,-0.133 cw(c5.35,-0.682) 6.125,-0.682 R12.2 6.125,-2.778 ccw(c6.722,-2.778) XT9.1
Voffset: DA9.1 DA11.3
Vref: DA10.1 DA10.4 DA15.5 | length 2.5
  Bottom Layer w0.2: DA10.4 -1.64,1.313 -0.826,0.499 ccw(c-0.434,0.892) -0.434,0.336 ccw(c-0.434,0.634) -0.224,0.423 ; -0.223,0.424 DA15.5
pads on no net: DA9.6 DA17.4

## Polygon pours and split planes (outlines as drawn)
NetC3_2 on Top Layer "NONET_L01_P-001" (solid, remove dead copper, pour order 42): 12.164,5.011 ccw(c12.164,4.926) 12.104,4.986 11.052,4.096 ccw(c11.417,3.728) 10.898,3.73 10.801,3.582 10.665,3.446 ccw(c10.858,3.252) 10.584,3.252 9.997,3.13 9.997,3.165 ccw(c9.673,3.166) 9.902,3.394 9.8,3.884 11.888,5.539
+5v on Top Layer "NONET_L01_P-001" (solid, remove dead copper, pour order 43): 4.213,-5.212 4.096,-5.095 ccw(c3.625,-5.566) 3.625,-4.9 3.013,-4.9 ccw(c3.013,-5.001) 2.941,-4.93 2.517,-4.505 2.729,-4.293 cw(c2.835,-4.399) 2.835,-4.249 cw(c2.835,-4.399) 2.941,-4.293 3.047,-4.399 ccw(c3.384,-4.062) 3.384,-4.539 4.236,-4.539 cw(c4.236,-4.906) 4.496,-4.646 4.637,-4.788
PWR_EN on Top Layer "NONET_L01_P-001" (solid, remove dead copper, pour order 44): 3.759,-2.011 cw(c3.949,-1.821) 3.68,-1.821 cw(c3.92,-1.821) 3.75,-1.651 3.835,-1.567 cw(c4.005,-1.736) 4.005,-1.496 cw(c4.005,-1.708) 4.154,-1.558 5.332,-2.736 cw(c5.168,-2.9) 5.4,-2.9 ccw(c5.824,-2.9) 5.524,-3.2 5.962,-3.638 5.538,-4.062 5.031,-3.555 cw(c5.285,-3.3) 4.925,-3.3 ccw(c4.63,-3.3) 4.838,-3.091
NetC8_2 on Top Layer "NONET_L01_P-001" (solid, remove dead copper, pour order 77): -13.122,0.324 ccw(c-13.088,0.401) -13.058,0.322 -11.736,0.711 ccw(c-11.921,1.196) -11.447,0.985 -11.299,1.081 -11.119,1.151 ccw(c-11.217,1.406) -10.967,1.295 -10.38,1.17 -10.395,1.138 ccw(c-10.099,1.007) -10.401,0.89 -10.505,0.401 -13.084,-0.271
NetC6_2 on Top Layer "NONET_L01_P-001" (solid, remove dead copper, pour order 76): -0.3,-13.134 ccw(c-0.378,-13.1) -0.298,-13.069 -0.688,-11.748 ccw(c-1.172,-11.933) -0.961,-11.459 -1.057,-11.311 -1.127,-11.131 ccw(c-1.382,-11.229) -1.271,-10.979 -1.146,-10.392 -1.114,-10.407 ccw(c-0.983,-10.111) -0.866,-10.413 -0.377,-10.517 0.295,-13.095
NetC5_2 on Top Layer "NONET_L01_P-001" (solid, remove dead copper, pour order 75): 5.032,-12.155 ccw(c4.947,-12.155) 5.007,-12.095 4.116,-11.044 ccw(c3.748,-11.41) 3.749,-10.892 3.601,-10.795 3.464,-10.659 ccw(c3.271,-10.852) 3.271,-10.578 3.147,-9.991 3.182,-9.991 ccw(c3.182,-9.667) 3.411,-9.896 3.901,-9.793 5.56,-11.879
NetC4_2 on Top Layer "NONET_L01_P-001" (solid, remove dead copper, pour order 49): 13.134,-0.323 ccw(c13.099,-0.4) 13.069,-0.321 11.746,-0.708 ccw(c11.931,-1.193) 11.458,-0.981 11.309,-1.077 11.129,-1.146 ccw(c11.227,-1.402) 10.977,-1.29 10.39,-1.165 10.405,-1.132 ccw(c10.109,-1.001) 10.411,-0.884 10.516,-0.396 13.096,0.272
NetC2_2 on Top Layer "NONET_L01_P-001" (solid, remove dead copper, pour order 48): 0.321,13.14 ccw(c0.398,13.106) 0.319,13.075 0.717,11.756 ccw(c1.2,11.944) 0.992,11.469 1.089,11.322 1.16,11.142 ccw(c1.415,11.242) 1.306,10.991 1.185,10.404 1.152,10.418 ccw(c1.023,10.121) 0.904,10.422 0.415,10.523 -0.274,13.097
NetC1_2 on Top Layer "NONET_L01_P-001" (solid, remove dead copper, pour order 46): -5.005,12.127 ccw(c-4.92,12.128) -4.98,12.067 -4.082,11.022 ccw(c-3.716,11.39) -3.714,10.872 -3.565,10.776 -3.428,10.64 ccw(c-3.236,10.835) -3.234,10.561 -3.106,9.975 -3.142,9.975 ccw(c-3.14,9.651) -3.37,9.879 -3.859,9.772 -5.531,11.847
NetC7_2 on Top Layer "NONET_L01_P-001" (solid, remove dead copper, pour order 45): -12.143,-5.008 ccw(c-12.143,-4.923) -12.083,-4.983 -11.032,-4.092 ccw(c-11.398,-3.724) -10.88,-3.725 -10.783,-3.577 -10.647,-3.441 ccw(c-10.84,-3.247) -10.566,-3.247 -9.979,-3.123 -9.979,-3.159 ccw(c-9.655,-3.159) -9.884,-3.388 -9.781,-3.877 -11.867,-5.536
NetC13_2 on Top Layer "NONET_L01_P-001" (solid, remove dead copper, pour order 78): 2.484,-4.087 cw(c2.815,-4.418) 2.815,-3.95 2.825,-3.95 cw(c2.825,-4.427) 3.162,-4.09 3.259,-4.187 3.684,-3.763 2.944,-3.023 2.941,-3.023 ccw(c2.941,-3.868) 2.343,-3.271 2.343,-3.334 cw(c2.23,-3.334) 2.31,-3.415 2.062,-3.663
+3v3 on Top Layer "NONET_L01_P-001" (solid, remove dead copper, pour order 79): -0.416,-2.165 ccw(c-1.051,-1.53) -0.153,-1.53 -0.153,-1.45 0.012,-1.284 cw(c0.275,-1.547) 0.275,-1.175 0.279,-1.179 ccw(c0.45,-1.009) 0.45,-1.25 0.464,-1.25 ccw(c0.464,-0.967) 0.664,-1.167 0.706,-1.125 cw(c0.876,-1.294) 0.876,-1.054 ccw(c0.876,-0.991) 0.921,-1.036 1.4,-0.556 1.824,-0.981 1.383,-1.422 ccw(c1.482,-1.521) 1.342,-1.521 1.342,-1.544 cw(c1.207,-1.544) 1.302,-1.64 0.729,-2.213 ccw(c0.928,-2.412) 0.647,-2.412 cw(c0.397,-2.412) 0.573,-2.589 0.291,-2.872
NetC18_2 on Top Layer "NONET_L01_P-001" (solid, remove dead copper, pour order 80): 2.007,0.176 2.613,0.782 ccw(c2.56,0.835) 2.635,0.835 3.29,0.179 ccw(c3.291,-0.182) 3.035,0.073 2.573,-0.389
NetC17_2 on Top Layer "NONET_L01_P-001" (solid, remove dead copper, pour order 93): -2.279,5.974 -2.173,6.08 cw(c-2.067,5.974) -2.067,6.124 -1.64,6.124 ccw(c-1.64,6.511) -1.366,6.237 -1.206,6.396 cw(c-1.153,6.343) -1.153,6.418 cw(c-1.153,6.343) -1.1,6.396 -0.941,6.237 ccw(c-0.367,6.812) -0.367,5.999 -0.356,5.999 cw(c-0.356,5.877) -0.27,5.964 -0.248,5.942 -1.074,5.116 -1.075,5.116 -1.096,5.137 cw(c-1.01,5.224) -1.132,5.224 -1.132,5.474 ccw(c-1.387,5.474) -1.206,5.654 ccw(c-1.378,5.482) -1.378,5.725 -1.45,5.725 ccw(c-1.45,5.172) -1.841,5.563 -1.855,5.549
+3v3 on Top Layer "NONET_L01_P-001" (solid, remove dead copper, pour order 95): -6.022,2.456 cw(c-6.317,2.161) -5.9,2.161 -5.9,1.769 -5.489,1.357 -5.192,1.653 ccw(c-5.181,1.728) -5.128,1.675 -4.81,1.993 ccw(c-4.863,2.047) -4.788,2.047 -5.803,3.061 ccw(c-5.81,2.986) -5.863,3.039 -6.181,2.721 ccw(c-6.128,2.668) -6.203,2.668 ccw(c-6.128,2.668) -6.181,2.615
GND on Top Layer "NONET_L01_P-001" (solid, remove dead copper, pour order 96): -15.011,0 ccw(c0,0) 0,-15.011 ccw(c0,0) 15.011,0 ccw(c0,0) 0,15.011 ccw(c0,0)
GND on GND "NONET_L01_P-001" (solid, remove dead copper, pour order 51): -15.011,0 ccw(c0,0) 0,-15.011 ccw(c0,0) 15.011,0 ccw(c0,0) 0,15.011 ccw(c0,0)
DAC_PWR on Bottom Layer "NONET_L01_P-001" (solid, remove dead copper, pour order 52): -2.118,-5.484 -1.965,-5.638 ccw(c-1.697,-5.37) -1.697,-5.748 cw(c-1.697,-6.063) -1.475,-5.841 -0.667,-6.648 ccw(c-0.501,-6.482) -0.501,-6.717 ccw(c-0.501,-6.567) -0.395,-6.673 -0.182,-6.461 ccw(c-0.289,-6.355) -0.139,-6.355 ccw(c-0.289,-6.355) -0.182,-6.249 -1.044,-5.387 ccw(c-1.126,-5.469) -1.126,-5.354 cw(c-1.126,-4.691) -1.594,-5.159 -1.694,-5.06
Vref on Bottom Layer "NONET_L01_P-001" (solid, remove dead copper, pour order 53): -5.008,1.543 -4.596,1.131 ccw(c-4.122,1.605) -4.122,0.934 -3.483,0.934 ccw(c-3.483,1.326) -3.206,1.049 -3.051,1.204 cw(c-2.727,0.88) -2.727,1.338 -2.453,1.338 cw(c-2.453,0.528) -1.88,1.101 -1.767,0.988 ccw(c-1.597,1.157) -1.597,0.917 cw(c-1.597,0.605) -1.376,0.826 -1.04,0.49 ccw(c-0.4,1.13) -0.4,0.225 ccw(c-0.4,0.866) 0.053,0.413 0.359,0.718 0.072,1.006 -0.04,0.894 cw(c-0.571,1.426) -0.571,0.674 cw(c-0.571,0.922) -0.747,0.747 -1.263,1.263 cw(c-1.217,1.308) -1.282,1.308 -1.538,1.565 cw(c-1.465,1.638) -1.569,1.638 ccw(c-1.738,1.468) -1.738,1.708 ccw(c-1.738,1.468) -1.908,1.638 cw(c-2.009,1.739) -2.009,1.596 -3.939,1.596 cw(c-3.939,2.258) -4.407,1.79 -4.584,1.967
NetDA11_7 on Bottom Layer "Bottom Layer-NetDA11_7" (solid, remove dead copper, pour order 54): 2.254,-1.298 2.537,-1.581 cw(c3.145,-2.189) 3.145,-1.329 3.232,-1.329 ccw(c3.232,-1.274) 3.271,-1.313 3.62,-0.965 4.131,-0.454 4.308,-0.278 ccw(c3.934,0.096) 4.463,0.097 4.463,0.433 ccw(c3.625,0.433) 4.217,1.025 4.123,1.119 cw(c5.145,2.141) 3.7,2.141 3.7,2.781 cw(c3.874,2.781) 3.751,2.904 ccw(c3.59,3.064) 3.817,3.064 3.817,3.131 cw(c4.646,3.131) 4.06,3.717 ccw(c4.007,3.77) 4.082,3.77 ccw(c4.007,3.77) 4.06,3.823 3.901,3.982 3.477,3.558 cw(c3.36,3.441) 3.525,3.441 3.525,2.961 cw(c3.384,2.961) 3.484,2.862 ccw(c3.565,2.78) 3.45,2.78 3.45,1.72 ccw(c4.645,1.72) 3.8,0.875 cw(c3.552,0.627) 3.903,0.627 3.903,0.416 cw(c3.3,0.416) 3.726,-0.01 3.53,-0.207 3.53,-0.214 2.75,-0.994 cw(c2.536,-0.781) 2.536,-1.082 ccw(c2.536,-1.242) 2.423,-1.129
NetC9_2 on Bottom Layer "NONET_L01_P-001" (solid, remove dead copper, pour order 55): -4.404,3.019 cw(c-4.209,2.824) -4.209,3.1 -4.175,3.1 cw(c-4.175,2.385) -3.669,2.891 -3.594,2.815 -3.17,2.815 cw(c-2.724,2.37) -2.724,3 -2.537,3 cw(c-2.537,2.341) -2.071,2.807 -1.664,2.4 -1.24,2.825 -1.965,3.549 ccw(c-2.018,3.496) -2.018,3.571 ccw(c-2.018,3.496) -2.071,3.549 cw(c-2.602,4.08) -2.602,3.329 -3.127,3.329 cw(c-3.127,3.651) -3.354,3.424 ccw(c-3.524,3.254) -3.524,3.494 ccw(c-3.524,3.254) -3.693,3.424 -3.736,3.381 cw(c-3.942,3.587) -3.942,3.296 -4.048,3.296 cw(c-4.048,3.799) -4.404,3.443
NetR2_1 on Bottom Layer "NONET_L01_P-001" (solid, remove dead copper, pour order 56): -3.806,3.62 cw(c-3.586,3.447) -3.552,3.725 ccw(c-3.136,7.132) -3.175,3.7 cw(c-3.181,3.171) -2.778,3.514 -2.725,3.492 ccw(c-2.725,3.567) -2.672,3.514 -2.354,3.832 ccw(c-2.407,3.885) -2.332,3.885 ccw(c-2.406,3.885) -2.354,3.938 -2.672,4.256 ccw(c-2.725,4.204) -2.725,4.278 ccw(c-2.725,4.204) -2.778,4.256 -2.937,4.097 cw(c-3.38,4.54) -3.38,3.914 -3.382,3.914 cw(c-3.382,4.624) -3.884,4.122 -3.912,4.15
NetC20_2 on Bottom Layer "NONET_L01_P-001" (solid, remove dead copper, pour order 57): 4.847,-0.398 cw(c4.997,-0.398) 4.891,-0.292 5.439,0.256 ccw(c5.197,0.499) 5.539,0.499 5.539,0.915 ccw(c4.991,0.915) 5.379,1.303 5.945,1.868 6.029,1.784 cw(c5.86,1.614) 6.1,1.614 6.1,1.446 cw(c5.575,1.446) 5.946,1.075 ccw(c6.101,0.921) 5.882,0.921 5.882,0.754 ccw(c6.361,0.754) 6.022,0.415 6.022,-0.009 5.315,-0.716 cw(c5.209,-0.61) 5.209,-0.76 cw(c5.209,-0.61) 5.103,-0.716 4.891,-0.504 cw(c4.997,-0.398)
NetDA11_1 on Bottom Layer "NONET_L01_P-001" (solid, remove dead copper, pour order 58): 2.169,-3.969 1.8,-3.6 ccw(c1.668,-3.733) 1.668,-3.545 1.514,-3.545 ccw(c1.514,-3.598) 1.477,-3.561 1.194,-3.278 1.194,-0.841 ccw(c1.1,-0.841) 1.166,-0.774 1.166,-0.548 1.335,-0.379 1.618,-0.662 ccw(c2.133,-1.177) 1.405,-1.177 1.405,-2.296 ccw(c2.428,-2.296) 1.704,-3.02 1.813,-3.128 ccw(c2.381,-2.56) 2.381,-3.363 cw(c2.381,-3.438) 2.434,-3.385 2.593,-3.544
+3v3 on Bottom Layer "NONET_L01_P-001" (solid, remove dead copper, pour order 59): -5.889,0.933 cw(c-5.783,1.039) -5.933,1.039 -5.933,1.584 ccw(c-5.991,1.584) -5.95,1.625 -5.35,1.625 -5.35,1.38 ccw(c-5.018,1.38) -5.253,1.145
BUF_PWR on Bottom Layer "NONET_L01_P-001" (solid, remove dead copper, pour order 60): -5.147,0.191 -4.387,-0.57 ccw(c-4.334,-0.517) -4.334,-0.592 ccw(c-4.334,-0.517) -4.281,-0.57 -3.967,-0.256 cw(c-3.652,-0.571) -3.652,-0.126 -3.56,-0.126 cw(c-3.56,-0.658) -3.184,-0.282 -3.11,-0.356 ccw(c-2.94,-0.186) -2.94,-0.426 ccw(c-2.94,-0.186) -2.771,-0.356 -2.014,0.401 ccw(c-2.184,0.57) -1.944,0.57 ccw(c-2.184,0.57) -2.014,0.74 -2.24,0.966 ccw(c-2.41,0.797) -2.41,1.037 ccw(c-2.41,0.797) -2.58,0.966 -2.815,0.731 cw(c-3.675,1.592) -3.675,0.375 -4.143,0.375 cw(c-4.143,1.194) -4.722,0.615
+3v3 on Bottom Layer "NONET_L01_P-001" (solid, remove dead copper, pour order 61): -4.2,-2.025 -3.756,-2.469 ccw(c-3.647,-2.361) -3.647,-2.514 ccw(c-3.647,-2.364) -3.541,-2.47 -3.329,-2.258 ccw(c-3.435,-2.152) -3.285,-2.152 ccw(c-3.435,-2.152) -3.329,-2.046 -3.75,-1.625
NetC19_2 on Bottom Layer "NONET_L01_P-001" (solid, remove dead copper, pour order 62): -2.905,-1.834 -2.835,-1.764 cw(c-2.5,-2.099) -2.5,-1.625 -2.354,-1.625 cw(c-2.354,-2.096) -2.021,-1.763 -1.597,-1.763 -1.487,-1.653 cw(c-1.06,-2.079) -1.06,-1.476 -0.916,-1.476 -0.755,-1.314 -1.042,-1.027 cw(c-1.357,-0.712) -1.357,-1.158 -1.809,-1.158 ccw(c-1.809,-1.233) -1.862,-1.18 -2.021,-1.339 cw(c-2.149,-1.211) -2.149,-1.392 -2.586,-1.392 cw(c-2.586,-1.09) -2.799,-1.303 -3.223,-1.728 -3.117,-1.834 ccw(c-3.011,-1.728) -3.011,-1.878 ccw(c-3.011,-1.728) -2.905,-1.834
NetDA15_6 on Bottom Layer "NONET_L01_P-001" (solid, remove dead copper, pour order 64): 0.531,0.546 0.653,0.668 ccw(c0.242,1.079) 0.824,1.079 cw(c0.899,1.079) 0.846,1.132 1.005,1.291 1.429,0.867 0.821,0.259
CH on Bottom Layer "NONET_L01_P-001" (solid, remove dead copper, pour order 65): 0.843,-5.33 1.314,-5.801 cw(c1.288,-5.828) 1.325,-5.828 1.75,-5.404 1.278,-4.932 cw(c1.305,-4.906) 1.267,-4.906
NetDA11_2 on Bottom Layer "NONET_L01_P-001" (solid, remove dead copper, pour order 66): 0.503,-3.049 0.286,-3.266 ccw(c0.795,-3.775) 0.075,-3.775 0.075,-4.12 cw(c-0.261,-4.12) -0.023,-4.357 0.401,-4.782 0.532,-4.651 cw(c0.775,-4.894) 0.775,-4.55 1.158,-4.55 cw(c1.158,-4.979) 1.462,-4.676 1.886,-4.251 1.727,-4.092 ccw(c1.674,-4.145) 1.674,-4.07 1.03,-4.07 cw(c1.03,-3.745) 0.8,-3.975 0.713,-3.888 cw(c0.927,-3.675) 0.625,-3.675 cw(c1.064,-3.675) 0.753,-3.365 0.806,-3.313
Voffset on Bottom Layer "NONET_L01_P-001" (solid, remove dead copper, pour order 67): -0.952,-3.964 -0.952,-3.752 -0.802,-3.602 -0.223,-3.024 ccw(c-0.395,-2.852) -0.152,-2.852 cw(c0.01,-2.852) -0.105,-2.738 0.116,-2.516 0.404,-2.804 0.188,-3.019 ccw(c1.062,-3.893) -0.174,-3.893 -0.174,-4.105 -0.386,-4.317 -0.598,-4.317
NetDA11_6 on Bottom Layer "NONET_L01_P-001" (solid, remove dead copper, pour order 68): 1.742,-0.891 2.024,-0.609 ccw(c1.84,-0.425) 2.1,-0.425 ccw(c1.625,-0.425) 1.961,-0.089 1.712,0.16 2.136,0.584 2.158,0.562 ccw(c2.55,0.955) 2.55,0.4 2.611,0.4 ccw(c2.611,0.839) 2.922,0.529 3.035,0.642 3.459,0.217 3.138,-0.103 cw(c3.115,-0.08) 3.115,-0.113 ccw(c3.115,-0.233) 3.03,-0.148 2.281,-0.897
+3v3 on Bottom Layer "NONET_L01_P-001" (solid, remove dead copper, pour order 69): 4.361,-1.246 cw(c4.085,-1.522) 4.475,-1.522 4.475,-1.594 cw(c4.142,-1.594) 4.377,-1.829 4.271,-1.935 4.696,-2.359 4.831,-2.224 ccw(c4.183,-1.575) 5.1,-1.575 5.1,-1.433 ccw(c4.386,-1.433) 4.891,-0.928 4.785,-0.822
NetC11_2 on Bottom Layer "NONET_L01_P-001" (solid, remove dead copper, pour order 70): 2.573,-2.181 2.602,-2.21 ccw(c2.715,-2.096) 2.715,-2.256 cw(c2.715,-3.007) 3.245,-2.476 3.457,-2.688 3.881,-2.263 3.881,-2.153 cw(c4.49,-2.153) 4.059,-1.723 4.165,-1.617 ccw(c4.059,-1.511) 4.209,-1.511 ccw(c4.059,-1.511) 4.165,-1.405 3.953,-1.193 ccw(c3.847,-1.299) 3.847,-1.149 ccw(c3.847,-1.299) 3.741,-1.193 3.511,-1.422 cw(c3.109,-1.021) 3.109,-1.589 2.613,-2.085 ccw(c2.71,-2.181)
NetC21_1 on Bottom Layer "NONET_L01_P-001" (solid, remove dead copper, pour order 71): 2.603,2.26 3.353,3.01 ccw(c3.3,3.063) 3.375,3.063 ccw(c3.3,3.063) 3.353,3.116 2.541,3.928 cw(c2.764,4.15) 2.449,4.15 ccw(c2.209,4.15) 2.379,4.32 2.336,4.362 1.771,3.797 2.154,3.413 cw(c1.815,3.073) 2.295,3.073 2.295,2.904 cw(c2.044,2.904) 2.222,2.727
NetC22_2 on Bottom Layer "NONET_L01_P-001" (solid, remove dead copper, pour order 72): 1.17,4.963 1.172,4.965 ccw(c0.493,5.644) 1.453,5.644 cw(c1.603,5.644) 1.497,5.75 1.709,5.962 cw(c1.815,5.856) 1.815,6.006 cw(c1.815,5.856) 1.921,5.962 2.787,5.096 cw(c2.734,5.043) 2.809,5.043 cw(c2.734,5.043) 2.787,4.99 2.469,4.672 cw(c2.416,4.725) 2.416,4.65 1.861,4.65 ccw(c1.861,4.272) 1.594,4.539
+3v3 on Bottom Layer "NONET_L01_P-001" (solid, remove dead copper, pour order 73): -0.331,5.645 cw(c0.691,4.623) 0.691,6.068 0.966,6.068 1.249,6.627 ccw(c0.583,3.885) 0.274,6.689 ccw(c0.594,4.975) -0.458,6.366 -0.755,6.069
+3v3 on Bottom Layer "NONET_L01_P-001" (solid, remove dead copper, pour order 74): -3.594,4.68 -2.771,5.503 cw(c-2.657,5.389) -2.657,5.55 -2.334,5.227 -2.334,5.056 -3.215,4.175 cw(c-3.382,4.342) -3.382,4.106
GND on Bottom Layer "NONET_L01_P-001" (solid, remove dead copper, pour order 94): -15.011,0 ccw(c0,0) 0,-15.011 ccw(c0,0) 15.011,0 ccw(c0,0) 0,15.011 ccw(c0,0)
+3v3 on VCC "NONET_L01_P-001" (solid, remove dead copper, pour order 92): -15.011,0 ccw(c0,0) 0,-15.011 ccw(c0,0) 15.011,0 ccw(c0,0) 0,15.011 ccw(c0,0)
GND on VCC (solid, remove dead copper, pour order 90): 11.878,-0.401 cw(c-0.066,0.01) 11.315,-3.636 cw(c9.223,-2.968) 10.773,-4.525 cw(c10.311,-4.064) 9.85,-4.525 2.992,2.333 ccw(c1.383,0.725) 1.382,3 cw(c1.382,4.586) 0.26,3.465 -0.57,4.295 cw(c-0.226,4.637) -0.57,4.98 0.448,5.998 ccw(c0.083,6.364) 0.596,6.304 ccw(c0.2,6.304) 0.2,6.7 -0.106,6.7 ccw(c-0.107,2.43) -3.126,5.449 -5.543,3.032 ccw(c-4.199,1.688) -6.1,1.687 ccw(c-5.588,1.687) -5.95,1.325 ccw(c-5.594,1.681) -5.238,1.325 -4.624,1.939 cw(c-4.419,1.734) -4.214,1.939 -3.875,1.6 cw(c-4.112,1.362) -3.875,1.125 -4.907,0.093 ccw(c-3.898,-0.916) -5.325,-0.917 ccw(c-3.992,-0.917) -3.992,-2.25 ccw(c-3.992,-1.833) -3.575,-1.833 ccw(c-4.008,-1.833) -4.008,-1.4 cw(c-4.009,-0.938) -4.335,-1.265 cw(c-3.933,-0.863) -4.335,-0.46 -3.333,0.542 cw(c-2.938,0.146) -2.542,0.542 -1.394,-0.606 cw(c-2.344,-1.557) -1,-1.558 -1,-5.164 ccw(c2.12,-5.164) -0.086,-7.37 1.196,-8.653 cw(c-0.923,-10.774) 2.075,-10.775 cw(c1.054,-10.776) 1.775,-11.5 cw(c0.948,-10.673) 1.051,-11.838 cw(c-0.001,0.001)

## Silkscreen, mask and mechanical layers (free items; w line width, h text height)
Top Overlay:
  lines w0.1: -1.376,-2.219 -1.157,-2 -0.65,-2
Board:
  circle w0.03: c0,0 r9.358
  circle w0.1: c0,0 r15.011
Top Assembly:
  lines w0.1: -23.125,0 23.125,0 ; 0,-23.125 0,23.125